# Altium PCB Board.PcbDoc
Units mil, origin at the board's own origin, x right, y up, seen from the top; angles counter-clockwise.
Board outline 2566.22 x 2313.66 mil, 2 copper layers (Top Layer, Bottom Layer); 63 components, 45 nets, 186 pads, 48 vias.
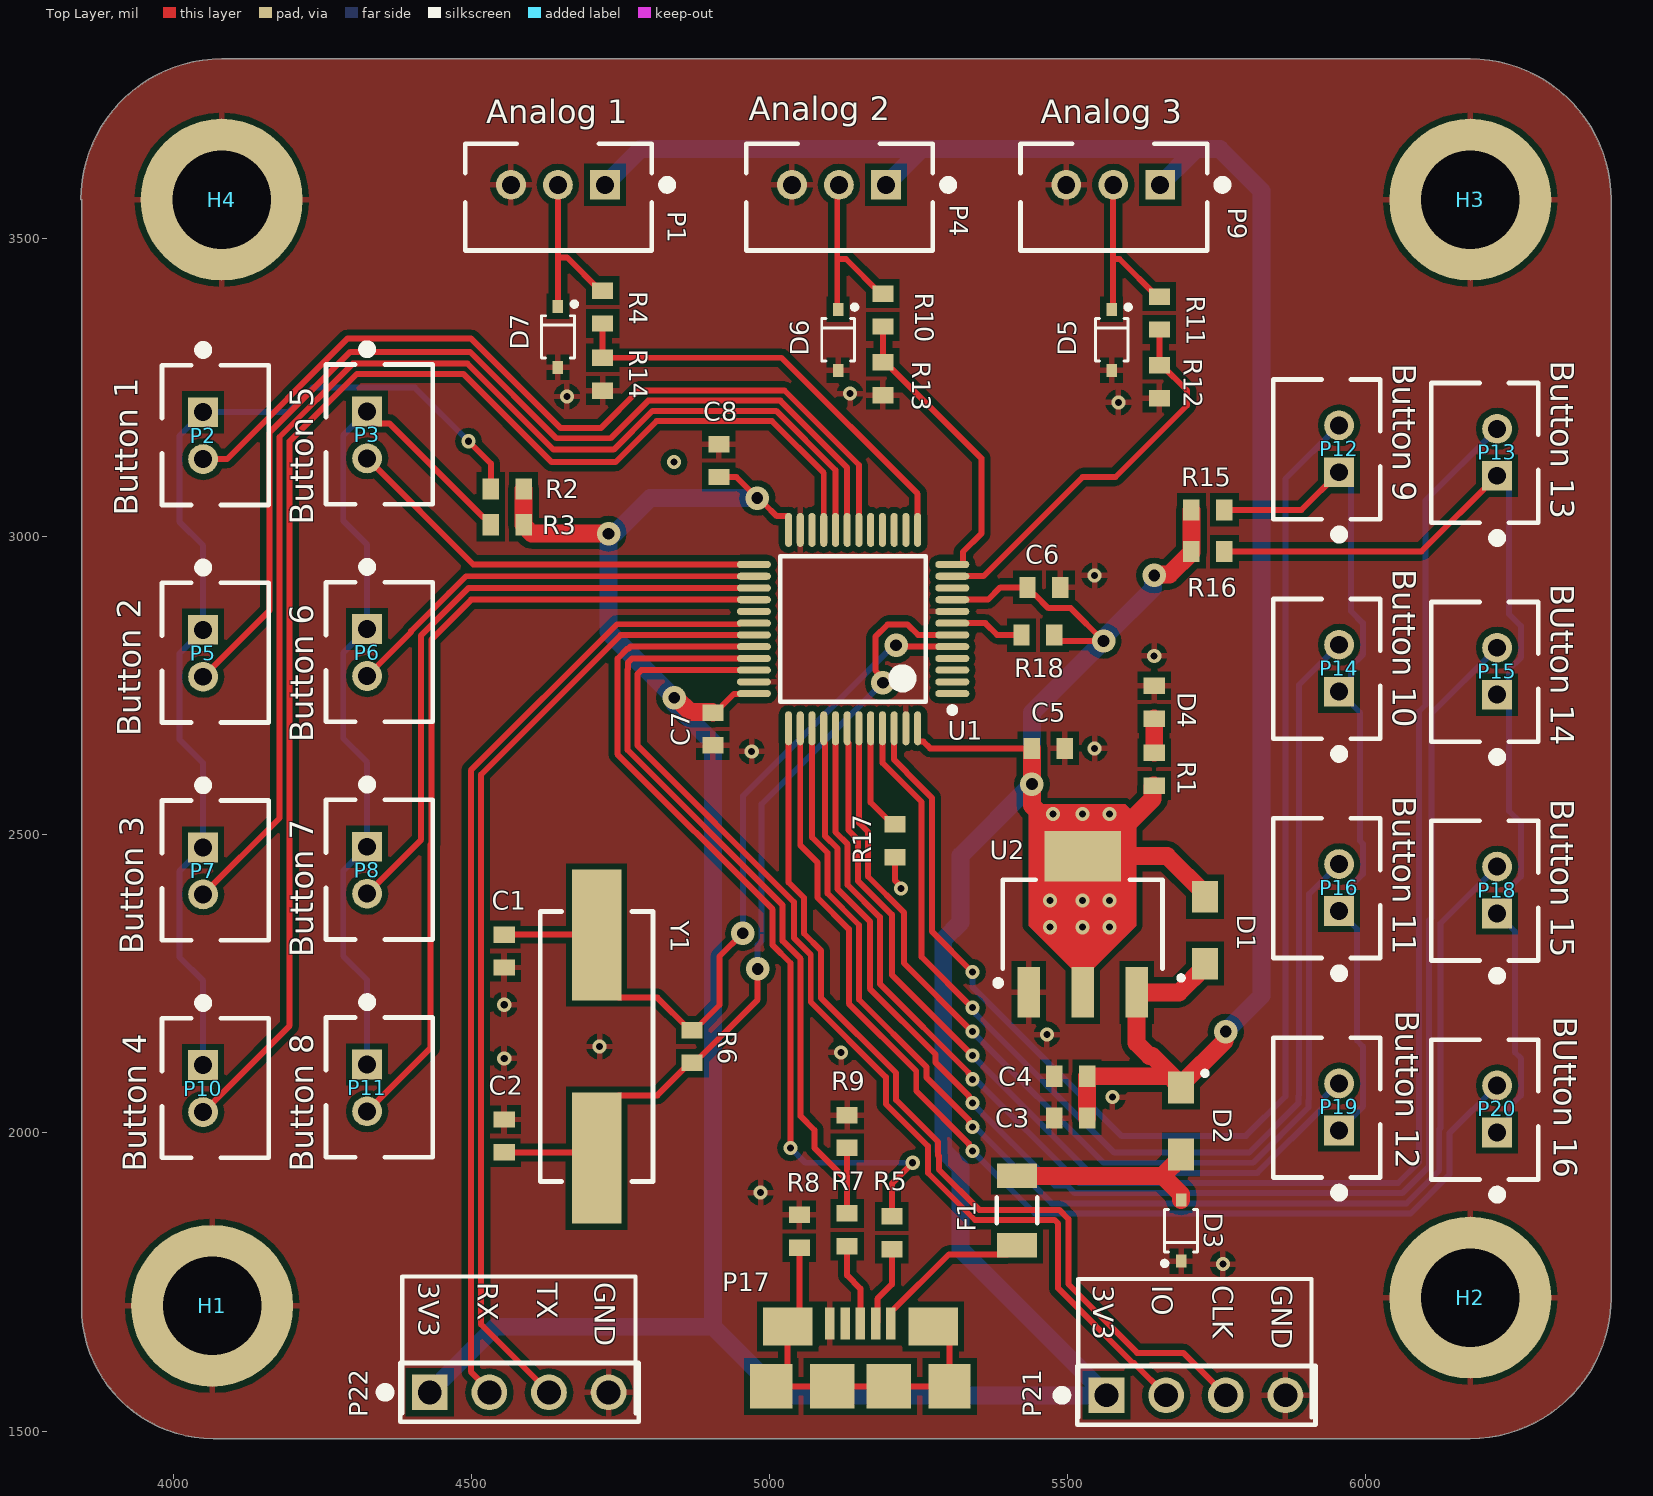
[diagram p0: Top Layer view]
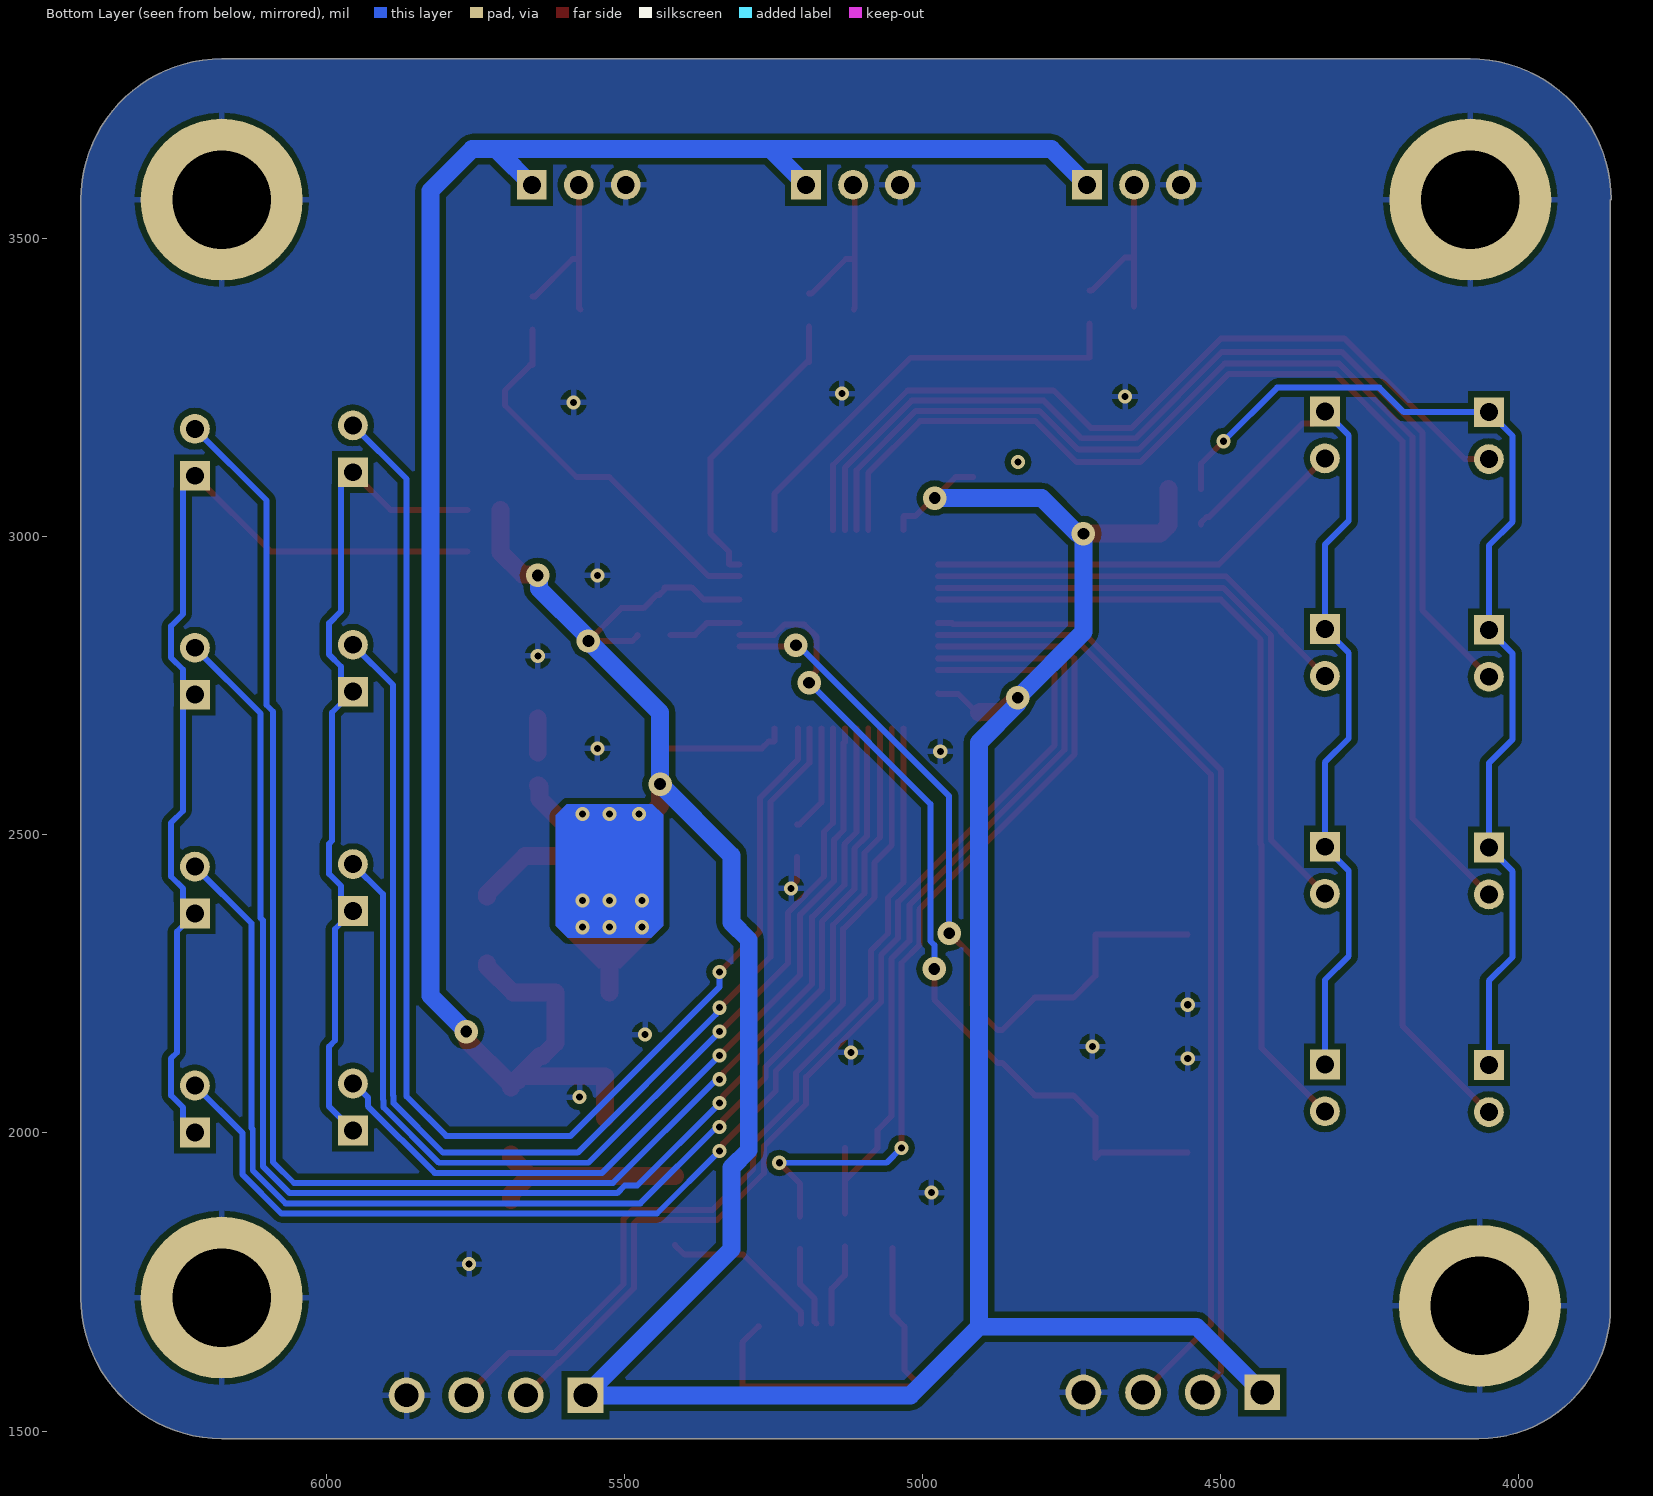
[diagram p1: Bottom Layer view, seen from below]

## Layer stack, top to bottom
Top Solder: solder mask 0.4, Solder Resist, Dk 3.5
Top Layer: signal copper 1.4
Dielectric 1: dielectric 12.6, FR-4, Dk 4.8
Bottom Layer: signal copper 1.4
Bottom Solder: solder mask 0.4, Solder Resist, Dk 3.5

## Board outline
3846.2,1708.18 ccw(c4066.82,1708.18) 4066.82,1487.56 6175,1487.56 ccw(c6175,1723.78) 6411.22,1723.78 6411.22,3565 ccw(c6175,3565) 6175,3801.22 4081.22,3801.22 ccw(c4081.22,3565) 3845,3565 3846.2,3565

## Design rules (kind name [scope] priority, off if disabled: settings)
Clearance [All] p1: gap=10 ignorepadtopadclearanceinfootprint=TRUE except(0: Arc-Hole Track-Hole SMDPad-Hole THPad-Hole Via-Hole Fill-Hole Poly-Hole Region-Hole Text-Hole; 5: Arc-THPad Track-THPad; 7: Arc-Arc Arc-Track Arc-SMDPad Arc-Via Track-Track Track-SMDPad Track-Via SMDPad-SMDPad SMDPad-THPad THPad-THPad)
HoleSize [All] p1: absolutevalues=TRUE maxlimit=248.03 minlimit=7.87 maxpercent=80.000 minpercent=20.000
MinimumAnnularRing [All] p1: minimumring=4
MinimumSolderMaskSliver [All] p1: minsoldermaskwidth=8
PolygonConnect [All] p1: connectstyle=Relief reliefconductorwidth=10 reliefentries=4 polygonreliefangle="90 Angle" airgapwidth=10
RoutingVias [All] p1: holewidth=15.75 width=27.56 viastyle="Through Hole" minholewidth=11.81 minwidth=23.62 maxholewidth=28 maxwidth=50
SilkToSilkClearance [All] p1: silktosilkclearance=8
SilkToSolderMaskClearance [IsPad] p1: minsilkscreentomaskgap=8 clearancetoexposedcopper=TRUE
SolderMaskExpansion [All] p1: expansion=4 istentingtop=FALSE
Width [All] p1: maxlimit=50 minlimit=5 preferedwidth=10 minimp=50.000000 maximp=50.000000 favimp=50.000000
26 further rules are at their usual default settings.

## Classes and differential pairs
component class Sheet1: C1 C2 C3 C4 C5 C6 C7 C8 D1 D2 D3 D4 F1 P17 R1 R5 R6 R7 R8 R9 R17 R18 U1 U2 Y1
component class IO: D5 D6 D7 H1 H2 H3 H4 P1 P2 P3 P4 P5 P6 P7 P8 P9 P10 P11 P12 P13 P14 P15 P16 P18 P19 P20 P21 P22 R2 R3 R4 R10 R11 R12 R13 R14 R15 R16

## Components (designator, comment, footprint, x,y, rotation, side; value= is the part's Value field where it differs from the comment)
C1 "cap_single_np" chip_0603 4555,2305 r270 top
C2 "cap_single_np" chip_0603 4555,1995 r270 top
C3 "cap_single_np" chip_0603 5505,2025 r180 top
C4 "cap_single_np" chip_0603 5505,2095 r180 top
C5 "cap_single_np" chip_0603 5467.44,2645 r0 top
C6 "cap_single_np" chip_0603 5460,2915 r0 top
C7 "cap_single_np" chip_0603 4905,2677.44 r270 top
C8 "cap_single_np" chip_0603 4915,3127.56 r90 top
D1 "diode_2" sod123_0 5730,2340 r90 top
D2 "diode_2" sod123_0 5690,2020 r270 top
D3 "diode_5" sod323_0 5690,1836.18 r90 top
D4 "diode_4" chip_0603 5645,2722.44 r270 top
D5 "diode_1" sod323_0 5573.74,3330 r270 top
D6 "diode_1" sod323_0 5115,3330 r270 top
D7 "diode_1" sod323_0 4645,3335 r270 top
F1 "PTC_0" chip_1206 5415,1870 r270 top
H1 "mounting_hole_0" #8-32_SOCKET_HEAD 4065,1710 r0 top
H2 "mounting_hole_0" #8-32_SOCKET_HEAD 6175,1723.78 r0 top
H3 "mounting_hole_0" #8-32_SOCKET_HEAD 6175,3565 r0 top
H4 "mounting_hole_0" #8-32_SOCKET_HEAD 4081.22,3565 r0 top
P1 "conn-3x1_0" JST_PHR_3_0 4723.74,3590 r180 top
P2 "conn-2x1_0" JST_PHR_2_0 4050,3208.74 r270 top
P3 "conn-2x1_0" JST_PHR_2_0 4325,3210 r270 top
P4 "conn-3x1_0" JST_PHR_3_0 5195,3590 r180 top
P5 "conn-2x1_0" JST_PHR_2_0 4050,2843.74 r270 top
P6 "conn-2x1_0" JST_PHR_2_0 4325,2845 r270 top
P7 "conn-2x1_0" JST_PHR_2_0 4050,2478.74 r270 top
P8 "conn-2x1_0" JST_PHR_2_0 4325,2480 r270 top
P9 "conn-3x1_0" JST_PHR_3_0 5655,3590 r180 top
P10 "conn-2x1_0" JST_PHR_2_0 4050,2113.74 r270 top
P11 "conn-2x1_0" JST_PHR_2_0 4325,2115 r270 top
P12 "conn-2x1_0" JST_PHR_2_0 5955,3107.91 r90 top
P13 "conn-2x1_0" JST_PHR_2_0 6220,3102.09 r90 top
P14 "conn-2x1_0" JST_PHR_2_0 5955,2740 r90 top
P15 "conn-2x1_0" JST_PHR_2_0 6220,2735 r90 top
P16 "conn-2x1_0" JST_PHR_2_0 5955,2372.09 r90 top
P17 "usb_micro_b" 10118192 5152.24,1680.32 r0 top
P18 "conn-2x1_0" JST_PHR_2_0 6220,2367.91 r90 top
P19 "conn-2x1_0" JST_PHR_2_0 5955,2004.17 r90 top
P20 "conn-2x1_0" JST_PHR_2_0 6220,2000.83 r90 top
P21 "conn-4x1_0" HDDR_4x1_0 5565,1560 r0 top
P22 "conn-4x1_0" HDDR_4x1_0 4430,1565 r0 top
R1 "res_single" chip_0603 5645,2610 r90 top
R2 "res_single" chip_0603 4560,3080 r0 top
R3 "res_single" chip_0603 4560,3020 r0 top
R4 "res_single" chip_0603 4720,3385 r90 top
R5 "res_single" chip_0603 5205,1832.56 r90 top
R6 "res_single" chip_0603 4870,2145 r270 top
R7 "res_single" chip_0603 5130,1837.56 r90 top
R8 "res_single" chip_0603 5050,1835 r90 top
R9 "res_single" chip_0603 5130,2002.44 r90 top
R10 "res_single" chip_0603 5190,3380 r90 top
R11 "res_single" chip_0603 5653.74,3375 r90 top
R12 "res_single" chip_0603 5653.74,3260 r270 top
R13 "res_single" chip_0603 5190,3265 r270 top
R14 "res_single" chip_0603 4720,3272.44 r270 top
R15 "res_single" chip_0603 5735,3045 r180 top
R16 "res_single" chip_0603 5735,2975 r180 top
R17 "res_single" chip_0603 5210,2490 r270 top
R18 "res_single" chip_0603 5450,2835 r0 top
U1 "STM32F103C8" LQFP48_0 5140,2845 r180 top
U2 "LM1117" sot-223-4 5525,2350 r90 top
Y1 "osc_xtal_2p_0" ABLS_AT49_OSC 4710,2145 r270 top

## Footprints (in the part's own frame and the unit in brackets; to place one, negate y for a bottom-side part, rotate by r counter-clockwise, add the part's x,y. Pads: shape width x height; smd on the part's side, far side on the other; paste and mask are expansions set on the pad)
10118192 [mm] "USB Micro B Type Receptacle"
  rect 0.4x1.35 smd: 1(1.3,0) 2(0.65,0) 3(0,0) 4(-0.65,0) 5(-1.3,0)
  rect 1.8x1.9 smd: PAD(-3.8,-2.675) PAD(3.8,-2.675)
  rect 2.1x1.6 smd: PAD(-3.1,-0.125) PAD(3.1,-0.125)
  rect 1.9x1.9 smd: PAD(-1.2,-2.675) PAD(1.2,-2.675)
#8-32_SOCKET_HEAD [mm] "Mounting hole for #8-32 socket head cap screw"
  round 6.9 hole 4.2: 0(0,0)
ABLS_AT49_OSC [mil] "ABLS Crystal Oscillator"
  rect 220x83 smd: 1(-187.01,0) 2(186.99,0)
  silkscreen extent -226,-94 226,94, body extent -224,-94 224,94, height 157
chip_0603 [mm]
  rect 0.7x0.9 smd: 1(-0.7,0) 2(0.7,0)
  body extent -0.85,-0.45 0.85,0.45, height 0.6
chip_1206 [mm]
  rect 1.05x1.7 smd: 1(-1.475,0) 2(1.475,0)
  silkscreen extent -0.55,-0.86 0.55,0.86, body extent -1.65,-0.85 1.65,0.85, height 0.6
HDDR_4x1_0 [mil]
  rect 60x60 hole 40: 1(0,0)
  round 60 hole 40: 2(100,0) 3(200,0) 4(300,0)
  silkscreen extent -83,-49 350,49, body extent -50,-50 350,50, height 336
JST_PHR_2_0 [mil]
  rect 50x50 hole 30: 1(0,0)
  round 50 hole 30: 2(78.74,0)
  silkscreen extent -112,-69 156,110, body extent -77,-69 156,110, height 236
JST_PHR_3_0 [mil]
  rect 50x50 hole 30: 1(0,0)
  round 50 hole 30: 2(78.74,0) 3(157.48,0)
  silkscreen extent -112,-69 234,110, body extent -77,-69 234,110, height 236
LQFP48_0 [mm] "LQFP48, 7.00x7.00mm, 0.50mm"
  oval 1.45x0.3 smd: 1(-4.225,2.75) 2(-4.225,2.25) 3(-4.225,1.75) 4(-4.225,1.25) 5(-4.225,0.75) 6(-4.225,0.25) 7(-4.225,-0.25) 8(-4.225,-0.75) 9(-4.225,-1.25) 10(-4.225,-1.75) 11(-4.225,-2.25) 12(-4.225,-2.75) 25(4.225,-2.75) 26(4.225,-2.25) 27(4.225,-1.75) 28(4.225,-1.25) 29(4.225,-0.75) 30(4.225,-0.25) 31(4.225,0.25) 32(4.225,0.75) 33(4.225,1.25) 34(4.225,1.75) 35(4.225,2.25) 36(4.225,2.75)
  oval 0.3x1.45 smd: 13(-2.75,-4.225) 14(-2.25,-4.225) 15(-1.75,-4.225) 16(-1.25,-4.225) 17(-0.75,-4.225) 18(-0.25,-4.225) 19(0.25,-4.225) 20(0.75,-4.225) 21(1.25,-4.225) 22(1.75,-4.225) 23(2.25,-4.225) 24(2.75,-4.225) 37(2.75,4.225) 38(2.25,4.225) 39(1.75,4.225) 40(1.25,4.225) 41(0.75,4.225) 42(0.25,4.225) 43(-0.25,4.225) 44(-0.75,4.225) 45(-1.25,4.225) 46(-1.75,4.225) 47(-2.25,4.225) 48(-2.75,4.225)
  silkscreen extent -4.35,-3.1 3.1,3.57, body extent -3.5,-3.5 3.5,3.5, height 1.6
sod123_0 [mm] "SOD123, 1.65mm x 2.70mm"
  rect 1.35x1.1 smd: 1(-1.425,0) 2(1.425,0)
  silkscreen extent -2.13,0.92 -1.93,1.12, body extent -1.45,-0.9 1.45,0.9, height 1
sod323_0 [mm] "SOD-323, 1.25mm x 1.7mm"
  rect 0.55x0.45 smd: 1(-1.3,0) 2(1.3,0)
  silkscreen extent -1.5,-0.7 0.9,0.8, body extent -0.9,-0.67 0.9,0.67, height 1
sot-223-4 [mm]
  rect 2.15x0.95 smd: 1(-2.9,2.3) 2(-2.9,0) 3(-2.9,-2.3)
  rect 2.15x3.25 smd: 4(2.9,0)
  silkscreen extent -2.62,-3.4 1.9,3.72, body extent -1.9,-3.4 1.9,3.4, height 1.1

## Part data
C1 C2: library part CAP-00409, "CAP, 18pF, ±2%, 50V, C0G, 0603", Capacitance=18pF, Manufacturer=Murata, Manufacturer PN=GRM1885C1H180GA01D, Tolerance=±2%, Voltage Rating=50V, Part Number=CAP-00409, Type=C0G
C3 C4 C5 C6 C7 C8: library part CAP-00477, "CAP, 0.1uF, ±10%, 100V, X7R, 0603", Capacitance=0.1uF, Manufacturer=Murata, Manufacturer PN=GRM188R72A104KA35D, Tolerance=±10%, Voltage Rating=100V, Part Number=CAP-00477, Type=X7R
D1 D2: library part DIO-00001, "Dio Shtky, 1A, 0.55V, 40V, SOD-123", Current Rating=1A, Forward Voltage=550mV, Manufacturer="ON Semi", Manufacturer PN=MBR140SFT1G, Reverse Breakdown Voltage=40V, Part Number=DIO-00001, Type=Schottky
D3: library part DIO-00037, "TVS, 5V, 500W", Manufacturer=ST, Manufacturer PN=ESDA8V2-1J, Power Rating=500W, Reverse Breakdown Voltage=5V, Part Number=DIO-00037, Type=TVS
D4: library part DIO-00050, "LED, Green, 0603, Low current, HELI2 Series", Current Rating=30mA, Forward Voltage=2.65V, Manufacturer=Kingbright, Manufacturer PN=APT1608LZGCK, Power Rating=120mW, Reverse Breakdown Voltage=5V, Cost=0.58, Part Number=DIO-00050, Type=LED
D5 D6 D7: library part DIO-00037, "TVS, 5V, 500W, SOD-323", Manufacturer=ST, Manufacturer PN=ESDA8V2-1J, Power Rating=500W, Reverse Breakdown Voltage=5V, Cost=0.33, Part Number=DIO-00037, Type=TVS
F1: library part MISC-00008, "PTC Resettable fuse, 6V, 500mA, 1206", Manufacturer=Eaton, Manufacturer PN=PTS12066V050, Cost=0.3, Part Number=MISC-00008
H1 H2 H3 H4: library part MISC-00027, "#8-32 Mounting Hole for Socket Head Cap Screw", Part Number=MISC-00027
P1 P4 P9: library part CONN-00047, "JST PH 3x1, THT, 2.00mm Pitch", Manufacturer=JST, Manufacturer PN=B3B-PH-K, Cost=0.19, Levels=1, Part Number=CONN-00047, Positions per level=3, Type=Header
P2 P3 P5 P6 P7 P8 P10 P11 P12 P13 P14 P15 P16 P18 P19 P20: library part CONN-00048, "JST PH 2x1, THT, 2.00mm Pitch", Manufacturer=JST, Manufacturer PN=B2B-PH-K, Cost=0.19, Levels=1, Part Number=CONN-00048, Positions per level=2, Type=Header
P17: library part CONN-00011, "USB Micro B Type Receptacle", Current=1.8, Manufacturer=Amphenol, Manufacturer PN=10118192, Levels=1, Part Number=CONN-00011, Positions per level=5, Type="USB Micro B"
P21 P22: library part CONN-00029, "Header 4x1, 0.1\"", Levels=1, Part Number=CONN-00029, Positions per level=4, Type=Header
R1: library part RES-00221, "RES SMD 330 OHM 1% 1/4W 0603", Manufacturer=Panasonic, Manufacturer PN=ERJ-PA3F3300V, Power Rating=0.25W, Resistance=330, Tolerance=1%, Part Number=RES-00221
R2 R3 R15 R16: library part RES-00188, "RES SMD 150 OHM 1% 1/4W 0603", Manufacturer=Panasonic, Manufacturer PN=ERJ-PA3F1500V, Power Rating=0.25W, Resistance=150, Tolerance=1%, Part Number=RES-00188
R4 R10 R11: library part RES-00586, "RES SMD 91K OHM 1% 1/4W 0603", Manufacturer=Panasonic, Manufacturer PN=ERJ-PA3F9102V, Power Rating=0.25W, Resistance=91k, Tolerance=1%, Part Number=RES-00586
R5 R7: library part RES-00129, "RES SMD 20 OHM 1% 1/4W 0603", Manufacturer=Panasonic, Manufacturer PN=ERJ-PA3F20R0V, Power Rating=0.25W, Resistance=20, Tolerance=1%, Part Number=RES-00129
R6: library part RES-00362, "RES SMD 1M OHM 1% 1/4W 0603", Manufacturer=Panasonic, Manufacturer PN=ERJ-PA3F1004V, Power Rating=0.25W, Resistance=1M, Tolerance=1%, Part Number=RES-00362
R8: library part RES-00116, "RES SMD 10 OHM 1% 1/4W 0603", Manufacturer=Panasonic, Manufacturer PN=ERJ-PA3F10R0V, Power Rating=0.25W, Resistance=10, Tolerance=1%, Part Number=RES-00116
R9: library part RES-00470, "RES SMD 4.7K OHM 1% 1/4W 0603", Manufacturer=Panasonic, Manufacturer PN=ERJ-PA3F4701V, Power Rating=0.25W, Resistance=4.7k, Tolerance=1%, Part Number=RES-00470
R12 R13 R14: library part RES-00492, "RES SMD 47K OHM 1% 1/4W 0603", Manufacturer=Panasonic, Manufacturer PN=ERJ-PA3F4702V, Power Rating=0.25W, Resistance=47k, Tolerance=1%, Part Number=RES-00492
R17 R18: library part RES-00301, "RES SMD 100K OHM 1% 1/4W 0603", Manufacturer=Panasonic, Manufacturer PN=ERJ-PA3F1003V, Power Rating=0.25W, Resistance=100k, Tolerance=1%, Part Number=RES-00301
U1: library part UCTRL-00008, "STM32 M3, LQFP-48", Manufacturer=ST, Manufacturer PN=STM32F103C8, Part Number=UCTRL-00008
U2: library part PWREG-00018, "REG, Linear, Fixed 3V3, 800mA, SOT-223", Manufacturer=TI, Manufacturer PN=LM1117MPX-3.3/NOPB, Max Current=800mA, Voltage Range In="4.5 - 15V", Voltage Range Out=3.3V, Cost=1.14, Fixed/Adj=Fixed, Part Number=PWREG-00018, Reg Type=Linear
Y1: library part OSC-00002, "XTAL, 8MHz, 18pF, 20ppm", Frequency=8.000M, Load Capacitance=18pF, Manufacturer=Abracon, Manufacturer PN=ABLS-8.000MHZ-B2-T, Tolerance=20ppm, ESR=80, Part Number=OSC-00002, Stability=50ppm

## Via types
v1: diameter 23.62, hole 11.81, Top Layer to Bottom Layer, 37 vias
v2: diameter 39.37, hole 19.68, Top Layer to Bottom Layer, 11 vias

## Nets (pads, with @x,y where several pads share a name; then routed paths per layer and width w, separated by ;. In a path a pad name is that pad's centre, name@x,y a point inside that pad or via, vN(x,y) a via of type N, cw(c..) or ccw(c..) an arc to the next point about the centre after c; other vN are vias at no path point)
+3.3: C5.1 C6.1 C7.1 C8.1 D1.2 P21.1 P22.1 R1.1 R2.2 R3.2 R15.2 R16.2 R18.2 U1.9 U1.24 U1.36 U1.48 U2.2 U2.4 | length 6670.7
  Top Layer w10: C7.1 4908.94,2705 4940.32,2736.39 4973.31,2736.39 U1.36 ; C8.1 4944.14,3100 v2(4979.38,3064.76) 4979.38,3063.57 4987.26,3055.69 4990.69,3055.69 5012.06,3034.32 5030.9,3034.32 5031.73,3033.49 U1.24 ; U1.48 5248.27,2657.04 5249.1,2656.21 5258.02,2656.21 5269.22,2645 C5.1 ; U1.9 5366.17,2894.21 5386.96,2915 C6.1 5432.44,2911.06 5441.22,2902.28 5445.16,2902.28 5467.44,2880 5505,2880 v2(5560,2825) 5486.34,2825 5477.56,2833.78 R18.2
  Top Layer w30: R3.2 R2.2 ; R3.2@4588.78,3017.28 4601.06,3005 v2(4730,3005) ; v2(4840,2730) 4842.54,2730 4866.32,2706.22 4903.78,2706.22 C7.1 ; C5.1 5439.88,2549.29 5476.02,2513.15 5476.02,2491.5 5503.35,2464.17 U2.4 ; U2.2 U2.4 ; R1.1 5643.5,2582.44 5642.28,2581.22 5642.28,2559.8 U2.4@5546.65,2464.17 ; v2(5645,2935) 5646.79,2936.79 5670.73,2936.79 5707.44,2973.5 R16.2 R15.2 ; D1.2 5730,2401.02 5666.85,2464.17 U2.4@5546.65,2464.17 ; U2.4 U2.4@5546.65,2464.17
  Bottom Layer w30: P22.1 4540,1675 4905,1675 ; v2@4840,2720 4905,2655 4905,1675 ; v2(4840,2730) 4730,2840 v2(4730,3005) 4740,3005 4799.76,3064.76 v2(4979.38,3064.76) ; v2(5645,2935) 5643.21,2933.21 5643.21,2913.21 5564.69,2834.69 5564.69,2832.22 5561.79,2829.33 5561.79,2826.79 5440,2705 v2(5440,2585) 5320,2465 5320,2352.82 5291.19,2324 5291.19,1971 5320,1942.18 5320,1805 P21.1 5020,1560 4905,1675
  other v1: 5470,2345 5525,2345 5570,2345 5470,2390 5525,2390 5570,2390 5475,2535 5525,2535 5570,2535
+5: F1.2 P17.1 | length 277
  Top Layer w10: P17.1 5203.43,1699.02 5300.67,1796.26 5399.33,1796.26 F1.2
+5_SAFE: C3.1 C4.1 D1.1 D2.1 P1.1 P4.1 P9.1 U2.3 | length 3430.1
  Top Layer w30: C3.1 C4.1 5671.1,2095 5678.43,2087.68 D2.1@5683.35,2087.68 ; D2.1 D2.1@5690,2081.02 ; D1.1 5730,2278.98 5686.85,2235.83 U2.3 5615.55,2150.55 5636.76,2129.34 5641.69,2129.34 D2.1@5683.35,2087.68 ; v2(5765,2170) 5763.21,2168.21 5763.21,2154.23 D2.1@5690,2081.02 ; D2.1@5683.35,2087.68 D2.1@5690,2081.02
  Bottom Layer w30: P1.1 4783.74,3650 5250,3650 ; P4.1 5250,3645 5250,3650 ; P9.1 5710,3645 5710,3650 ; v2(5765,2170) 5825,2230 5825,3580 5755,3650 5710,3650 ; 5250,3650 5710,3650
GND: C1.2 C2.1 C3.2 C4.2 C5.2 C6.2 C7.2 C8.2 D3.1 D4.1 D5.2 D6.2 D7.2 H1.0 H2.0 H3.0 H4.0 P1.3 P4.3 P9.3 P17.5 P21.4 P22.4 R8.2 R9.2 R12.2 R13.2 R14.2 R17.2 U1.8 U1.23 U1.35 U1.47 U2.1 | length 56.6
  Top Layer w10: R17.2 5210,2423.69 5220,2413.69 v1(5220,2410)
  other v1: 5760,1780 4985,1900 5575,2060 4555,2125 5120,2135 4715,2145 5465,2165 4555,2215 4970,2640 5545,2645 5645,2800 5545,2935 5585,3225 4660,3235 5135,3240
NetD2_2: D2.2 D3.2 F1.1 | length 346.2
  Top Layer w30: F1.1 5659.09,1928.07 ; D3.2 5690,1897.17 5659.09,1928.07 ; D2.2 5690,1958.98 5659.09,1928.07
NetD4_2: D4.2 R1.2 | length 57.3
  Top Layer w30: R1.2 D4.2
NetD5_1: D5.1 P9.2 R11.2 | length 317
  Top Layer w10: D5.1 5576.24,3383.68 5576.24,3465.59 ; P9.2@5578.76,3592.5 P9.2 5576.24,3465.59 ; R11.2 5649.8,3402.56 5586.77,3465.59 5576.24,3465.59
NetD6_1: D6.1 P4.2 R10.2 | length 311.2
  Top Layer w10: D6.1 5113.44,3382.75 5113.44,3465.59 ; P4.2 5113.44,3587.18 5113.44,3465.59 ; R10.2 5186.06,3407.56 5128.03,3465.59 5113.44,3465.59
NetD7_1: D7.1 P1.2 R4.2 | length 301.8
  Top Layer w10: D7.1 4645,3468.09 ; P1.2 4645,3468.09 ; R4.2 4716.06,3412.56 4660.53,3468.09 4645,3468.09
NetP2_1: P2.1 P5.1 P7.1 P10.1 R2.1 | length 1789.3
  Top Layer w10: v1(4495,3160) 4532.44,3122.56 R2.1
  Bottom Layer w10: P10.1 4050,2255.15 4010,2295.15 4010,2438.74 P7.1 4050,2620.15 4010,2660.15 4010,2803.74 P5.1 4050,2985.15 4010,3025.15 4010,3168.74 P2.1 4192.48,3208.74 4233.74,3250 4405,3250 v1(4495,3160)
NetP2_2: P2.2 U1.18 | length 1432.3
  Top Layer w10: P2.2 4090,3130 4292,3332 4499.54,3332 4649.54,3182 4717,3182 4780,3245 5025,3245 5149.84,3120.16 U1.18
NetP3_1: P3.1 P6.1 P8.1 P11.1 R3.1 | length 1482.9
  Top Layer w10: P3.1 4345,3190 4362.44,3190 4519.72,3032.72 4523.66,3032.72 4532.44,3023.94 R3.1
  Bottom Layer w10: P11.1 4325,2256.41 4285,2296.41 4285,2440 P8.1 4325,2621.41 4285,2661.41 4285,2805 P6.1 4325,2986.41 4285,3026.41 4285,3170 P3.1
NetP3_2: P3.2 U1.25 | length 722.4
  Top Layer w10: P3.2 4502.99,2953.27 U1.25
NetP5_2: P5.2 U1.19 | length 1717.6
  Top Layer w10: P5.2 4161,2876 4161,3174.08 4296.92,3310 4497.49,3310 4642.49,3165 4733.46,3165 4796.46,3228 5017.96,3228 5130.16,3115.8 U1.19
NetP6_2: P6.2 U1.26 | length 718.9
  Top Layer w10: P6.2 4398.62,2839.88 4398.62,2841.42 4462.7,2905.5 4490.78,2933.58 U1.26
NetP7_2: P7.2 U1.20 | length 2031.5
  Top Layer w10: P7.2 4178,2528 4178,3167.04 4300.96,3290 4493.45,3290 4637.55,3145.91 4738.41,3145.91 4803.51,3211 5010.92,3211 5110.47,3111.44 U1.20
NetP8_2: P8.2 U1.27 | length 1061.9
  Top Layer w10: P8.2 4415.62,2491.88 4415.62,2834.38 4469.74,2888.5 4495.4,2914.16 4973.4,2914.16 U1.27
NetP10_2: P10.2 U1.21 | length 2349.3
  Top Layer w10: P10.2 4195,2180 4195,3160 4308,3273 4486.41,3273 4634.41,3125 4741.55,3125 4810.55,3194 5003.88,3194 5090.79,3107.09 U1.21
NetP11_2: P11.2 U1.28 | length 1404.4
  Top Layer w10: P11.2 4431.52,2142.78 4431.52,2483.74 4432.62,2484.84 4432.62,2827.34 4476.78,2871.5 4499.49,2894.21 U1.28
NetP12_1: P12.1 P14.1 P16.1 P19.1 R15.1 | length 1421.7
  Top Layer w10: R15.1 5892.09,3045 P12.1
  Bottom Layer w10: P19.1 5995,2044.17 5995,2145 5985,2155 5985,2342.09 P16.1 5975,2392.09 5975,2414.26 5995,2434.26 5995,2485 5990,2490 5990,2705 P14.1 5975,2760 5975,2782.17 5995,2802.17 5995,2855 5975,2875 5975,3087.91 P12.1
NetP12_2: P12.2 U1.46 | length 2306.7
  Top Layer w10: U1.46 5208.9,2626.1 5230,2605 5230,2604.04 5272,2562.04 5272,2338 v1(5340,2270)
  Bottom Layer w10: v1(5340,2270) 5340,2245 5387.57,2197.43 5590,1995 5798.79,1995 5865,2061.21 5865,3096.65 P12.2
NetP13_1: P13.1 P15.1 P18.1 P20.1 R16.1 | length 1710.8
  Top Layer w10: R16.1 6092.91,2975 P13.1
  Bottom Layer w10: P20.1 6240,2020.83 6240,2043 6260,2063 6260,2125 6250,2135 6250,2337.91 P18.1 6240,2387.91 6240,2410.09 6260,2430.09 6260,2520 6240,2540 6240,2715 P15.1 6240,2755 6240,2777.17 6260,2797.17 6260,2850 6240,2870 6240,3082.09 P13.1
NetP13_2: P13.2 U1.41 | length 2803.3
  Top Layer w10: U1.41 5110.47,2504.53 5131,2484 5131,2415.92 5185,2361.92 5185,2250 5333.54,2101.46 5333.54,2100.14 5340,2093.69 v1(5340,2090)
  Bottom Layer w10: v1(5340,2090) 5345,2090 5519,1916 6053.88,1916 6089,1951.12 6089,2706.78 6100,2717.78 6100,3060.83 P13.2
NetP14_2: P14.2 U1.45 | length 2012.9
  Top Layer w10: U1.45 5189.21,2620.79 5255,2555 5255,2295 v1(5340,2210)
  Bottom Layer w10: v1(5340,2210) 5340,2206.31 5346.46,2199.86 5346.46,2198.54 5578,1967 5803.92,1967 5886.75,2049.84 5886.75,2061.75 5887.85,2062.85 5887.85,2751.59 P14.2
NetP15_2: P15.2 U1.40 | length 2496
  Top Layer w10: U1.40 5090.79,2655.53 5092.57,2653.75 5092.57,2498.39 5114,2476.96 5114,2408.88 5168,2354.88 5168,2242 5278.35,2131.65 5278.35,2117.97 5334.2,2062.12 5334.2,2059.48 5340,2053.69 v1(5340,2050)
  Bottom Layer w10: v1(5340,2050) 5478.19,1911.81 5499.15,1911.81 5511.96,1899 6060.92,1899 6106,1944.08 6106,2356.7 6110,2360.7 6110,2703.74 P15.2
NetP16_2: P16.2 U1.43 | length 1710
  Top Layer w10: U1.43 5149.84,2520.16 5165,2505 5165,2430 5225,2370 5225,2285 v1(5340,2170)
  Bottom Layer w10: v1(5340,2170) 5560,1950 5810.96,1950 5903.75,2042.79 5903.75,2054.71 5904.85,2055.81 5904.85,2400.67 P16.2
NetP17_2: P17.2 R5.1 | length 135.9
  Top Layer w10: P17.2 5180.71,1683.19 5180.71,1721.89 5205,1746.18 R5.1
NetP17_3: P17.3 R7.1 | length 138.9
  Top Layer w10: R7.1 5130,1761.24 5152.24,1739 P17.3
NetP17_PAD: P17.PAD R8.1 | length 663.7
  Top Layer w10: R8.1 5050,1695.2 5030.2,1675.39 5030.2,1602.56 5002.64,1575 5105,1575 5199.49,1575 5301.85,1575 5301.85,1648.9 5275.35,1675.39 P17.PAD@5274.29,1675.39
NetP18_2: P18.2 U1.39 | length 2188.7
  Top Layer w10: U1.39 5071.1,2495.82 5097,2469.92 5097,2401.83 5150,2348.83 5150,2223.78 5262.91,2110.87 5262.91,2093.42 5334.2,2022.12 5334.2,2019.48 5340,2013.69 v1(5340,2010)
  Bottom Layer w10: v1(5340,2010) 5345,2010 5473,1882 6067.96,1882 6123,1937.04 6123,2006.61 6125,2008.61 6125,2351.65 P18.2
NetP19_2: P19.2 U1.42 | length 1402.8
  Top Layer w10: U1.42 5130.16,2655.53 5131.94,2653.75 5131.94,2508.06 5148,2492 5148,2422.96 5205,2365.96 5205,2265 v1(5340,2130)
  Bottom Layer w10: v1(5340,2130) 5537,1933 5818,1933 5930,2045 5930,2059.63 5953.28,2082.91 P19.2
NetP20_2: P20.2 U1.38 | length 1881.3
  Top Layer w10: U1.38 5051.42,2482.28 5080,2453.69 5080,2394.79 5133,2341.79 5133,2216.74 5245.91,2103.83 5245.91,2070.42 5334.2,1982.12 5334.2,1979.48 5340,1973.69 v1(5340,1970)
  Bottom Layer w10: v1(5340,1970) 5445,1865 6075,1865 6140,1930 6140,1999.57 P20.2
NetP21_2: P21.2 U1.34 | length 1853.8
  Top Layer w10: U1.34 4784.76,2776.1 4778.66,2770 4778.66,2649.42 5040.72,2387.37 5040.72,2327.37 5069,2299.08 5069,2219.67 5195,2093.67 5195,2048.45 5265.72,1977.74 5265.72,1932.74 5344.55,1853.91 5478.05,1853.91 5483.91,1848.05 5483.91,1739.55 5609.21,1614.25 5610.75,1614.25 P21.2
NetP21_3: P21.3 U1.37 | length 1546.4
  Top Layer w10: U1.37 5031.73,2420.39 5057.72,2394.41 5057.72,2334.41 5086,2306.12 5086,2226.72 5212,2100.72 5212,2055.49 5282.72,1984.78 5282.72,1962.28 5283.75,1961.25 5283.75,1938.75 5351.59,1870.91 5485.73,1870.91 5500.91,1855.73 5500.91,1746.59 5616.25,1631.25 5693.75,1631.25 P21.3
NetP22_2: P22.2 U1.30 | length 1632.9
  Top Layer w10: P22.2 4530,1568.64 4498.91,1599.73 4498.91,2607.95 4744.02,2853.06 4948.75,2853.06 4950.53,2854.84 U1.30
NetP22_3: P22.3 U1.31 | length 1638
  Top Layer w10: P22.3 4515.91,1679.09 4515.91,2600.91 4750.16,2835.16 U1.31
NetR4_1: R4.1 R14.1 U1.13 | length 740.7
  Top Layer w10: R4.1 R14.1 5020,3300 5248.27,3071.73 U1.13
NetR5_2: R5.2 U1.32 | length 1497.5
  Top Layer w10: U1.32 4766.59,2815.47 4763.91,2812.79 4762.36,2812.79 4745,2795.43 4745,2784.42 4744.66,2784.08 4744.66,2635.34 5005,2375 5005,2315 5035,2285 v1(5035,1975) ; R5.2 5205,1915 v1(5240,1950)
  Bottom Layer w10: v1(5035,1975) 5060,1950 v1(5240,1950)
NetR7_2: R7.2 R9.1 U1.33 | length 1345.6
  Top Layer w10: U1.33 4769.4,2795.79 4762.76,2789.14 4762.76,2778.14 4761.66,2777.04 4761.66,2642.38 5022,2382.04 5022,2322.04 5052,2292.04 5052,2028 5075,2005 5075,1975 5130,1920 ; R7.2 5130,1920 ; R9.1 5130,1920
NetR10_1: R10.1 R13.1 U1.12 | length 499.9
  Top Layer w10: R10.1 R13.1 5193.94,3292.56 5355,3131.5 5355,3005 5324.17,2974.17 5324.17,2954.1 5323.34,2953.27 U1.12
NetR11_1: R11.1 R12.1 U1.11 | length 661.2
  Top Layer w10: U1.11 5306.69,2933.93 5358.93,2933.93 5525,3100 5580,3100 5700,3220 5700,3245.24 5657.68,3287.56 R12.1 R11.1
NetR17_1: R17.1 U1.44 | length 180.2
  Top Layer w10: U1.44 5169.53,2554.09 5206.06,2517.56 R17.1
NetR18_1: R18.1 U1.7 | length 124.3
  Top Layer w10: U1.7 5361.82,2854.84 5381.66,2835 R18.1
OSC_IN: C1.1 R6.1 U1.5 Y1.1 | length 1312.2
  Top Layer w10: C1.1 4709.45,2332.56 Y1.1 4710,2263.51 4746.5,2227.01 4811.61,2227.01 4866.06,2172.56 R6.1@4873.94,2172.56 ; R6.1 R6.1@4873.94,2172.56 ; v2(4955,2335) 4916.05,2296.05 4916.05,2214.67 R6.1@4873.94,2172.56 ; v2(5212.15,2817.85) 5214.18,2815.82 5305.99,2815.82 U1.5
  Bottom Layer w10: v2(4955,2335) 4955,2564.81 5208.04,2817.85 v2(5212.15,2817.85)
OSC_OUT: C2.2 R6.2 U1.6 Y1.2 | length 1428.3
  Top Layer w10: C2.2 4700.57,1967.44 Y1.2 4710,2026.51 4746.5,2063.01 4811.63,2063.01 4866.06,2117.44 R6.2@4873.94,2117.44 ; R6.2 R6.2@4873.94,2117.44 ; v2(4980,2275) 4980,2223.5 R6.2@4873.94,2117.44 ; v2(5190,2755) 5190,2762.95 5177.46,2775.49 5177.46,2832.22 5197.78,2852.54 5231.63,2852.54 5249.01,2835.16 U1.6
  Bottom Layer w10: v2(4980,2275) 4980,2315.19 4986.69,2321.88 4986.69,2551.69 v2(5190,2755)
pads on no net: P17.4 U1.1 U1.2 U1.3 U1.4 U1.10 U1.14 U1.15 U1.16 U1.17 U1.22 U1.29
copper on no net:
  other v1: 4840,3125

## Polygon pours and split planes (outlines as drawn)
GND on Top Layer "Top Layer-No Net2" (solid, pour order 10): 3846.2,1708.18 ccw(c4066.82,1708.18) 4066.82,1487.56 6175,1487.56 ccw(c6175,1723.78) 6411.22,1723.78 6411.22,3565 ccw(c6175,3565) 6175,3801.22 4081.22,3801.22 ccw(c4081.22,3565) 3845,3565 3846.2,3565
GND on Bottom Layer "Top Layer-No Net" (solid, pour order 9): 3846.2,1708.18 ccw(c4066.82,1708.18) 4066.82,1487.56 6175,1487.56 ccw(c6175,1723.78) 6411.22,1723.78 6411.22,3565 ccw(c6175,3565) 6175,3801.22 4081.22,3801.22 ccw(c4081.22,3565) 3845,3565 3846.2,3565
no net on Top Overlay (solid): 5460,2420
no net on Top Overlay (solid): 5550,2320

## Other copper
Top Layer:
  region net +3.3: 5506,2276.5 5435,2347.5 5435,2533.5 5453,2551.5 5596,2551.5 5615,2532.5 5615,2347.5 5544,2276.5
Bottom Layer:
  region net +3.3: 5435,2347.5 5435,2533.5 5453,2551.5 5596,2551.5 5615,2532.5 5615,2347.5 5595,2327.5 5455,2327.5

## Silkscreen, mask and mechanical layers (free items; w line width, h text height)
Top Overlay:
  lines w7: 4384,1530 4384,1759 4775,1759 4775,1530 ; 5517.71,1523 5517.71,1755 5908.71,1755 5908.71,1523
  text "Analog 2" at 4965,3698.12 h39.37
  text "Analog 1" at 4525,3693.12 h39.37
  text "Analog 3" at 5455,3693.12 h39.37
  text "Button 13" at 6310,3295 h39.37 r270
  text "Button 9" at 6045,3290 h39.37 r270
  text "Button 1" at 3940,3035 h39.37 r90
  text "Button 5" at 4235,3020 h39.37 r90
  text "Button 10" at 6045,2945 h39.37 r270
  text "BUtton 14" at 6310,2920 h39.37 r270
  text "Button 2" at 3945,2665 h39.37 r90
  text "Button 6" at 4235,2655 h39.37 r90
  text "Button 11" at 6045,2565 h39.37 r270
  text "Button 15" at 6310,2560 h39.37 r270
  text "Button 3" at 3950,2300 h39.37 r90
  text "Button 7" at 4235,2295 h39.37 r90
  text "Button 12" at 6050,2205 h39.37 r270
  text "BUtton 16" at 6315,2195 h39.37 r270
  text "Button 4" at 3955,1935 h39.37 r90
  text "Button 8" at 4235,1935 h39.37 r90
  text "3V3" at 4400,1750 h59.06 r270
  text "RX" at 4499,1750 h59.06 r270
  text "GND" at 4695,1750 h59.06 r270
  text "TX" at 4599,1749 h59.06 r270
  text "3V3" at 5531,1745 h59.06 r270
  text "IO" at 5629.71,1745 h59.06 r270
  text "CLK" at 5731.71,1745 h59.06 r270
  text "GND" at 5830,1745 h59.06 r270
Bottom Overlay:
Mechanical 1:
  lines w10: 3845,3565 cw(c4081.22,3565) 4081.22,3801.22 6175,3801.22 cw(c6175,3565) 6411.22,3565 6411.22,1723.78 cw(c6175,1723.78) 6175,1487.56 4066.82,1487.56 cw(c4066.82,1708.18) 3846.2,1708.18 3846.2,3565

## Dimensions
3975,1490 to 4081.22,3801.22 on Mechanical 15
3845,1625 to 6411.22,1723.78 on Mechanical 15